# Altium PCB PCB1.PcbDoc
Units mil, origin at the board's own origin, x right, y up, seen from the top; angles counter-clockwise.
Board outline 8540 x 3380 mil, 2 copper layers (Top Layer, Bottom Layer); 76 components, 75 nets, 303 pads, 25 vias.
Unrouted connection lines stored in the file: 2.
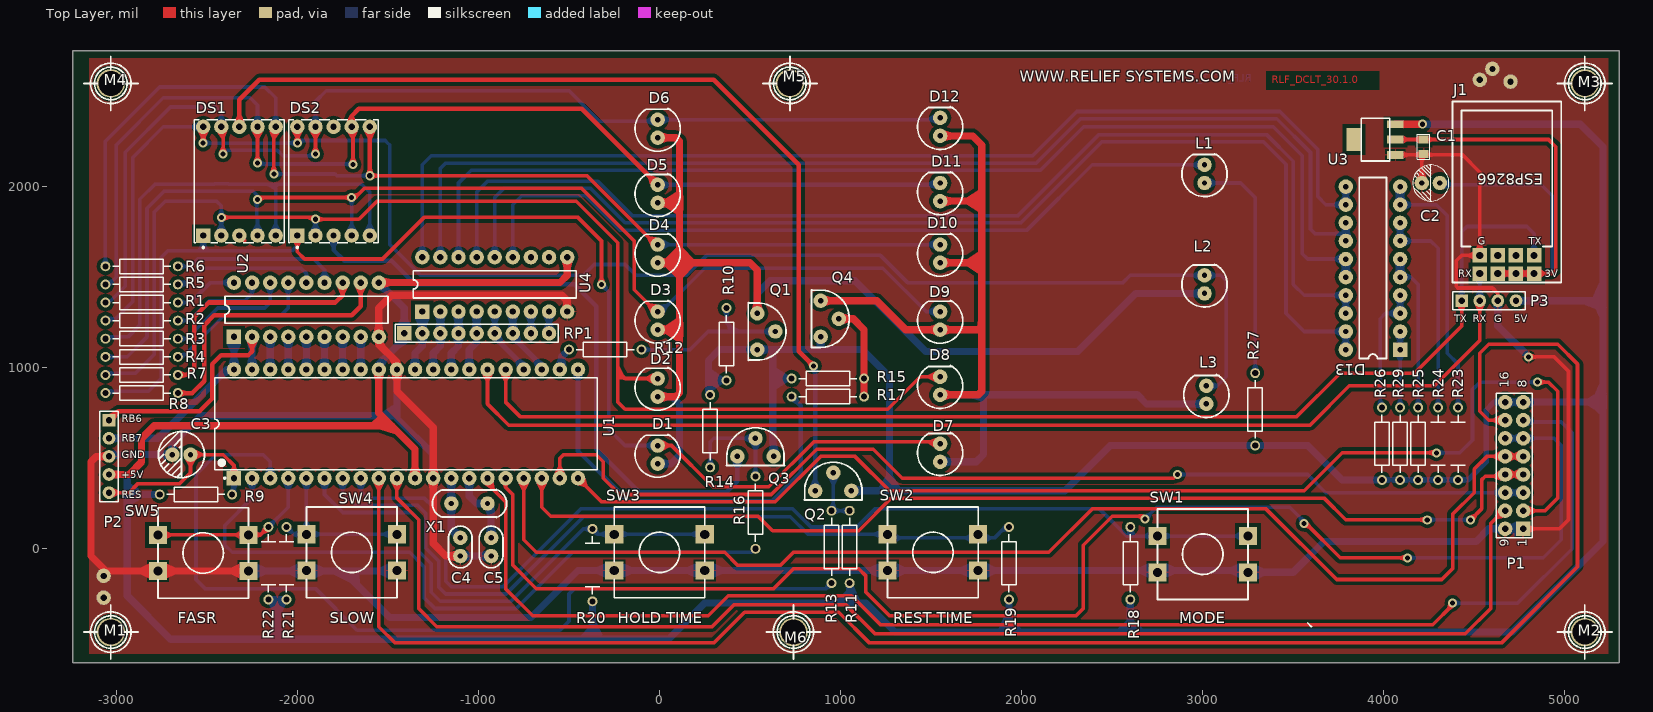
[diagram p0: Top Layer view]
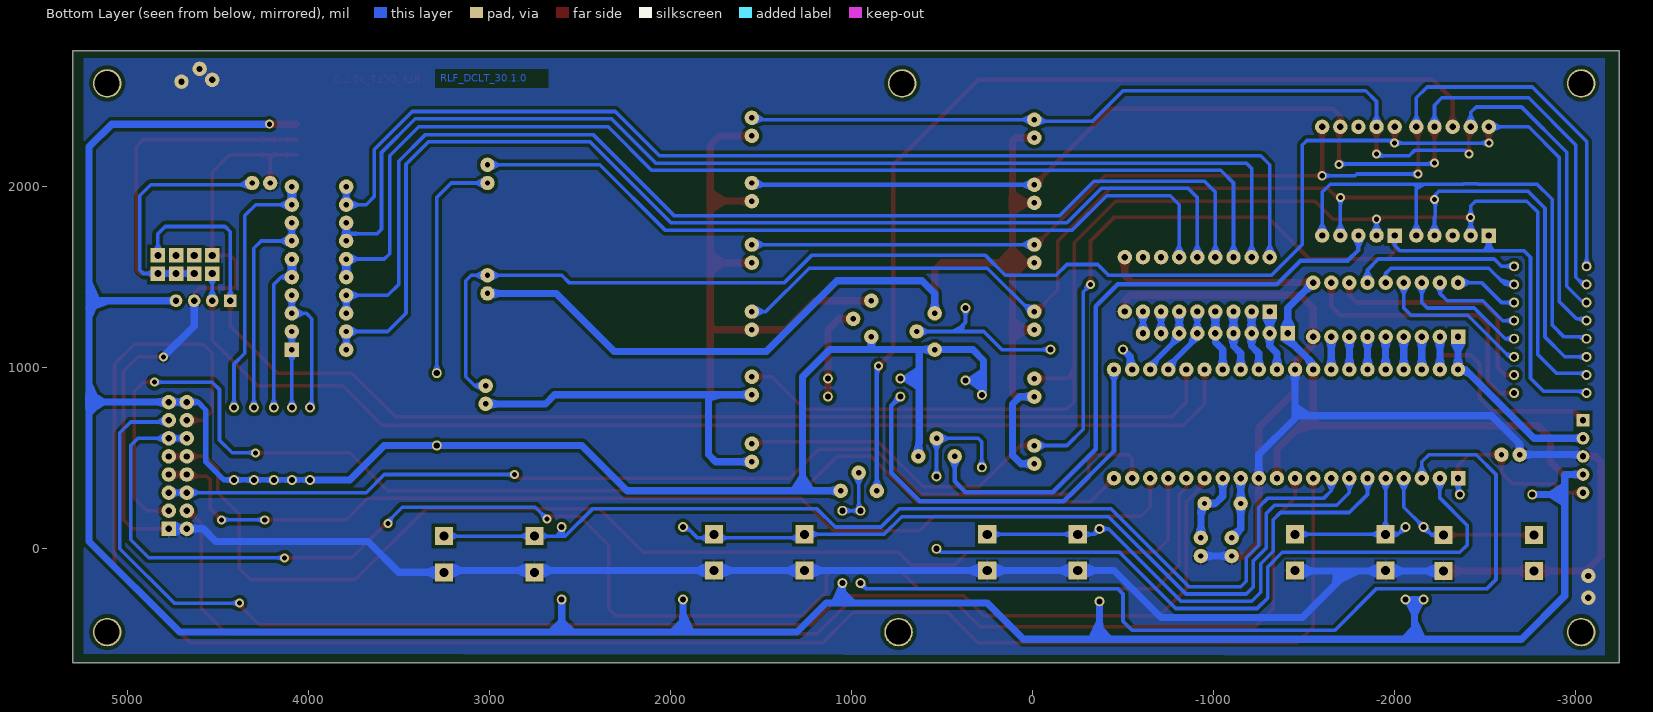
[diagram p1: Bottom Layer view, seen from below]

## Layer stack, top to bottom
Top Solder: solder mask 0.4, Solder Resist, Dk 3.5
Top Layer: signal copper 1.4
Dielectric 1: dielectric 12.6, FR-4, Dk 4.8
Bottom Layer: signal copper 1.4
Bottom Solder: solder mask 0.4, Solder Resist, Dk 3.5

## Board outline
-3240,2750 -3240,1780 -3240,-630 -2970,-630 5300,-630 5300,860 5300,2750

## Design rules (kind name [scope] priority, off if disabled: settings)
Clearance [All] p1: gap=20
PolygonConnect [All] p1: connectstyle=Relief reliefconductorwidth=10 reliefentries=4 polygonreliefangle="90 Angle" airgapwidth=10
RoutingVias [All] p1: holewidth=28 width=50 viastyle="Through Hole" minholewidth=28 minwidth=50 maxholewidth=28 maxwidth=50
SolderMaskExpansion [All] p1: expansion=4
UnpouredPolygon [All] p1: allowunpoured=FALSE
Width [All] p1: maxlimit=100 minlimit=10 preferedwidth=20
29 further rules are at their usual default settings.

## Classes and differential pairs
component class Sheet3: D13 L1 R18 R19 R20 R21 R22 R23 R24 R25 R26 R27 R29 SW1 SW2 SW3 SW4 SW5 U4
component class Sheet2: D1 D2 D3 D4 D5 D6 D7 D8 D9 D10 D11 D12 DS1 DS2 L2 L3 M1 M2 M3 M4 M5 M6 Q1 Q2 Q3 Q4 R10 R11 R12 R13 R14 R15 R16 R17
component class Sheet1: C1 C2 C3 C4 C5 J1 P1 P2 P3 R1 R2 R3 R4 R5 R6 R7 R8 R9 RP1 U1 U2 U3 X1

## Components (designator, comment, footprint, x,y, rotation, side; value= is the part's Value field where it differs from the comment)
C1 "Cap" RES0805 4220,2220 r90 top
C2 "Cap" Capacitor10UF/63V 4260,2020 r180 top
C3 "Cap" CAP_220uF -2640,520 r180 top
C4 "Cap" CAP_104 -1100,10 r90 top
C5 "Cap" CAP_104 -930,10 r90 top
D1 "LED" LED5MM -10,520 r90 top locked
D2 "LED" LED5MM -10,890 r90 top locked
D3 "LED" LED5MM -10,1260 r90 top locked
D4 "LED" LED5MM -10,1630 r90 top locked
D5 "LED" LED5MM -10,1960 r90 top locked
D6 "LED" LED5MM -10,2320 r90 top locked
D7 "LED" LED5MM 1550,530 r90 top locked
D8 "LED" LED5MM 1550,900 r90 top locked
D9 "LED" LED5MM 1550,1260 r90 top locked
D10 "LED" LED5MM 1550,1630 r90 top locked
D11 "LED" LED5MM 1550,1970 r90 top locked
D12 "LED" LED5MM 1550,2330 r90 top locked
D13 "LED BAR" LED_BAR 4090,1100 r180 top
DS1 "HDSP-511A" HDSP-51 -2320,2030 r0 top locked
DS2 "HDSP-511A" HDSP-51 -1800,2030 r0 top locked
J1 "ESP8266" ESP8266 4830,1620 r0 top
L1 "LED" LED5MM 3010,2070 r90 top locked
L2 "LED" LED5MM 3010,1460 r90 top locked
L3 "LED" LED5MM 3020,850 r90 top locked
M1 "MH" "Mounting hole" -3030,-460 r0 top
M2 "MH" "Mounting hole" 5110,-460 r0 top
M3 "MH" "Mounting hole" 5110,2570 r0 top
M4 "MH" "Mounting hole" -3030,2570 r0 top
M5 "MH" "Mounting hole" 720,2570 r0 top
M6 "MH" "Mounting hole" 740,-460 r0 top
P1 "Header 8X2A" HDR2X8_CEN 4770,110 r90 top
P2 "Header 5" HDR1X5 -3040,710 r270 top
P3 "Header 4" HDR1X4 4430,1370 r0 top
Q1 "BC558" TRANSISTOR_BC548 540,1200 r0 top
Q2 "BC558" TRANSISTOR_BC548 960,320 r90 top
Q3 "BC558" TRANSISTOR_BC548 530,510 r90 top
Q4 "BC558" TRANSISTOR_BC548 890,1270 r0 top
R1 "Res2" AXIAL-0.4 -2860,1360 r180 top
R2 "Res2" AXIAL-0.4 -2860,1260 r180 top
R3 "Res2" AXIAL-0.4 -2860,1160 r180 top
R4 "Res2" AXIAL-0.4 -2860,1060 r180 top
R5 "Res2" AXIAL-0.4 -2860,1460 r180 top
R6 "Res2" AXIAL-0.4 -2860,1560 r180 top
R7 "Res2" AXIAL-0.4 -2860,960 r180 top
R8 "Res2" AXIAL-0.4 -2860,860 r180 top
R9 "Res2" AXIAL-0.4 -2560,300 r180 top
R10 "Res2" AXIAL-0.4 370,1130 r270 top
R11 "Res2" AXIAL-0.4 1050,10 r270 top
R12 "Res2" AXIAL-0.4 -300,1100 r180 top
R13 "Res2" AXIAL-0.4 950,10 r270 top
R14 "Res2" AXIAL-0.4 280,650 r90 top
R15 "Res2" AXIAL-0.4 930,940 r180 top
R16 "Res2" AXIAL-0.4 530,200 r270 top
R17 "Res2" AXIAL-0.4 930,840 r180 top
R18 "Res2" AXIAL-0.4 2600,-80 r270 top
R19 "Res2" AXIAL-0.4 1930,-80 r270 top
R20 "Res2" AXIAL-0.4 -370,-90 r270 top
R21 "Res2" AXIAL-0.4 -2060,-80 r270 top
R22 "Res2" AXIAL-0.4 -2160,-80 r270 top
R23 "Res2" AXIAL-0.4 4410,580 r270 top
R24 "Res2" AXIAL-0.4 4300,580 r270 top
R25 "Res2" AXIAL-0.4 4190,580 r270 top
R26 "Res2" AXIAL-0.4 3990,580 r270 top
R27 "Res2" AXIAL-0.4 3290,770 r90 top
R29 "Res2" AXIAL-0.4 4090,580 r270 top
RP1 "SIP" HDR1X9 -1410,1190 r0 top
SW1 "SWITCH_BIG" "SWITCH - BIG" 3000,-30 r0 top locked
SW2 "SWITCH_BIG" "SWITCH - BIG" 1510,-20 r0 top locked
SW3 "SWITCH_BIG" "SWITCH - BIG" 0,-20 r0 top locked
SW4 "SWITCH_BIG" "SWITCH - BIG" -1700,-20 r0 top locked
SW5 "SWITCH_BIG" "SWITCH - BIG" -2520,-23.3 r0 top locked
U1 "PIC16F877A-E/P" PDIP600-P40 -1400,690 r90 top
U2 "ULN2803" ULN2803 -2350,1170 r90 top
U3 "Reg" LM1117 3950,2260 r90 top
U4 "ULN2803" ULN2803 -1310,1310 r90 top
X1 "CRYSTAL" CRYSTAL -1050,250 r180 top

## Footprints (in the part's own frame and the unit in brackets; to place one, negate y for a bottom-side part, rotate by r counter-clockwise, add the part's x,y. Pads: shape width x height; smd on the part's side, far side on the other; paste and mask are expansions set on the pad)
AXIAL-0.4 [mm] "Axial Device, Thru-Hole; 2 Leads; 0.4 in Pin Spacing"
  round 1.4 hole 0.85: 1(-5.08,0) 2(5.08,0)
  silkscreen extent -4.06,-1.02 4.06,1.02
CAP_104 [mil]
  round 80 hole 30: 1(-50,0) 2(50,0)
  silkscreen extent -115,-65 115,65
CAP_220uF [mil]
  round 80 hole 30: 1(-50,0) 2(50,0)
  silkscreen extent -127,-127 127,127
Capacitor10UF/63V [mil]
  round 80 hole 30: 1(-50,0) 2(50,0)
  silkscreen extent -100,-100 100,100
CRYSTAL [mil] "200mil"
  round 80 hole 30: 1(-100,0) 2(100,0)
  silkscreen extent -205,-76 204,76
ESP8266 [mil] "Serial WiFi Module"
  rect 80x80 hole 40: 1(0,0) 2(0,-100) 3(-100,0) 4(-100,-100) 5(-200,0) 6(-200,-100) 7(-300,0) 8(-300,-100)
  silkscreen extent -450,-150 150,850
HDR1X4 [mil] "Connector; Header; 4 Position"
  rect 70x70 hole 35.43: 1(0,0)
  round 70 hole 35.43: 2(100,0) 3(200,0) 4(300,0)
  silkscreen extent -50,-50 350,50
HDR1X5 [mil] "Connector; Header; 5 Position"
  rect 70x70 hole 35.43: 1(0,0)
  round 70 hole 35.43: 2(100,0) 3(200,0) 4(300,0) 5(400,0)
  silkscreen extent -50,-50 450,50
HDR1X9 [mil] "Connector; Header; 9 Position"
  rect 80x80 hole 35: 1(0,0)
  round 80 hole 35: 2(100,0) 3(200,0) 4(300,0) 5(400,0) 6(500,0) 7(600,0) 8(700,0) 9(800,0)
  silkscreen extent -50,-50 850,50
HDR2X8_CEN [mil] "Connector; Header; 8x2 Position"
  rect 80x80 hole 35: 1(0,0)
  round 80 hole 35: 2(100,0) 3(200,0) 4(300,0) 5(400,0) 6(500,0) 7(600,0) 8(700,0) 9(0,100) 10(100,100) 11(200,100) 12(300,100) 13(400,100) 14(500,100) 15(600,100) 16(700,100)
  silkscreen extent -50,-50 750,150
HDSP-51 [mil] "LED, 7-Segment Display, 14.27 mm, RHD; 10 Leads; Row Space 15.24 mm; Pitch 2.54 mm"
  rect 80x80 hole 35: 1(-200,-300)
  round 80 hole 35: 2(-100,-300) 3(0,-300) 4(100,-300) 5(200,-300) 6(200,300) 7(100,300) 8(0,300) 9(-100,300) 10(-200,300)
  silkscreen extent -248,-371 248,341
LED5MM [mil]
  round 80 hole 30: 1(-50,0) 2(50,0)
  silkscreen extent -125,-125 112,125
LED_BAR [mil]
  rect 80x80 / inner rect 100x50 / far side rect 80x80 hole 30: 1(0,0)
  round 80 / inner oval 100x50 / far side round 80 hole 30: 2(0,-100) 3(0,-200) 4(0,-300) 5(0,-400) 6(0,-500) 7(0,-600) 8(0,-700) 9(0,-800) 10(0,-900) 11(300,-900) 12(300,-800) 13(300,-700) 14(300,-600) 15(300,-500) 16(300,-400) 17(300,-300) 18(300,-200) 19(300,-100) 20(300,0)
  silkscreen extent 75,-950 225,50
LM1117 [mm]
  rect 1.1x2.3 smd: 1(-2.15,-2.9) 2(0,-2.9) 3(2.15,-2.9)
  rect 3.25x2.15 smd: 4(0,2.9)
  silkscreen extent -3,-2.1 3,1.9
"Mounting hole" [mm]
  round 4 hole 3.5: ""(0,0)
  silkscreen extent -3.81,-3.81 3.81,3.81
PDIP600-P40 [mil] "DIP, 40-Leads, Row Spacing 15.24mm, Pitch 2.54mm, Body 51.8x13.5mm"
  rect 80x80 hole 35: 1(-300,950)
  round 80 hole 35: 2(-300,850) 3(-300,750) 4(-300,650) 5(-300,550) 6(-300,450) 7(-300,350) 8(-300,250) 9(-300,150) 10(-300,50) 11(-300,-50) 12(-300,-150) 13(-300,-250) 14(-300,-350) 15(-300,-450) 16(-300,-550) 17(-300,-650) 18(-300,-750) 19(-300,-850) 20(-300,-950) 21(300,-950) 22(300,-850) 23(300,-750) 24(300,-650) 25(300,-550) 26(300,-450) 27(300,-350) 28(300,-250) 29(300,-150) 30(300,-50) 31(300,50) 32(300,150) 33(300,250) 34(300,350) 35(300,450) 36(300,550) 37(300,650) 38(300,750) 39(300,850) 40(300,950)
  silkscreen extent -305,-1057 254,1057, body extent -287,-1057 287,1057, height 250
RES0805 [mm]
  rect 1.1x1.4 smd: 1(-1,0) 2(1,0)
  silkscreen extent -1.75,-0.89 1.77,0.89
"SWITCH - BIG" [mil]
  rect 100x100 hole 50: 1(-250,100) 2(-250,-100) 3(250,-100) 4(250,100)
  silkscreen extent -250,-250 250,250
TRANSISTOR_BC548 [mil]
  round 80 hole 30: 1(0,100) 2(100,0) 3(0,-100)
  silkscreen extent -50,-160 158,160
ULN2803 [mil]
  rect 80x80 / inner rect 100x50 / far side rect 80x80 hole 35: 1(0,0)
  round 80 / inner oval 100x50 / far side round 80 hole 35: 2(0,-100) 3(0,-200) 4(0,-300) 5(0,-400) 6(0,-500) 7(0,-600) 8(0,-700) 9(0,-800) 10(300,-800) 11(300,-700) 12(300,-600) 13(300,-500) 14(300,-400) 15(300,-300) 16(300,-200) 17(300,-100) 18(300,0)
  silkscreen extent 75,-850 225,50

## Part data
C1: library part CAP_104_SMD, "Cap_104_SMD"
C2: library part Cap-10uf/63V, "Cap10uf/63V"
C3: library part CAP_220uF, "Cap_220uF"
C4 C5: library part CAP_104, "Cap_104"
D1 D2 D3 D4 D5 D6 D7 D8 D9 D10 D11 D12 L1 L2 L3: library part LED_5MM, "LED_5MM"
D13: library part LED_BAR
DS1 DS2: "14.22 mm General Purpose AlGaAs Red 7-Segment Display: CA, RH DP"
J1: "WIFI Module"
P1: "Header, 8-Pin, Dual row"
P2: "Header, 5-Pin"
P3: "Header, 4-Pin"
Q1 Q2 Q3 Q4: "PNP"
R1 R2 R3 R4 R5 R6 R7 R8 R9 R10 R11 R12 R13 R14 R15 R16 R17 R18 R19 R20 R21 R22 R23 R24 R25 R26 R27 R29: "Resistor"
RP1: library part "Header 9", "Network resistor 9 pin"
SW1 SW2 SW3 SW4 SW5: "Big size"
U1: "Enhanced FLASH Microcontroller, 8K (x14-Bit words) FLASH, 368 Bytes RAM, 40-Pin PDIP, Standard VDD Range, Extended Temperature"
U2 U4: "??voltage,  high??current darlington drivers comprised of eight NPN  darlington pairs.  All units feature integral clamp diodes for"
U3: library part LM1117

## Free pads (board coordinates)
  round 80 hole 35: 0(-3070,-150) 1(-3070,-270) 2(4530,2590) 3(4700,2580) 4(4600,2650)

## Via types
v1: diameter 50, hole 28, Top Layer to Bottom Layer, 25 vias

## Nets (pads, with @x,y where several pads share a name; then routed paths per layer and width w, separated by ;. In a path a pad name is that pad's centre, name@x,y a point inside that pad or via, vN(x,y) a via of type N, cw(c..) or ccw(c..) an arc to the next point about the centre after c; other vN are vias at no path point)
3V: C1.2 C2.1 J1.2 J1.4 J1.6 U3.2 | length 3278
  Top Layer w20: U3.2 4910,2260 4950,2220 4950,1540 4930,1520 J1.2 J1.4 J1.6
  Bottom Layer w20: C2.1 4320,2010 4870,2010 4930,1950 4930,1540 4910,1520 J1.2 J1.4 J1.6
+5: P1.8 P1.16 P2.4 P3.4 Q1.3 Q2.3 Q3.3 Q4.3 R9.2 R10.2 R11.2 R14.2 R15.2 R18.2 R19.2 R20.2 R21.2 R22.2 R23.2 R24.2 R25.2 R26.2 R27.1 R29.2 RP1.1 U1.11 U1.32 U2.10 U3.3 U4.10 | length 26975.1
  Top Layer w40: P2.4 -2930,410 -2860,480 -2860,610 -2790,680 -1480,680 -1350,550 ; U1.32 -1550,750 -1350,550 ; U2.10 -550,1470 -510,1510 U4.10 ; U1.11 -1350,550 ; U3.3 v1(4214.65,2344.65)
  Bottom Layer w30: R26.2 R29.2 R25.2 R24.2 R23.2 4464.85,380 4565,480.15 4565,765 4610,810 P1.16 P1.8
  Bottom Layer w40: P2.4 -2940,410 -2940,300 ; R9.2 -2940,300 ; R22.2 -2110,-280 ; -2150,-490 -2110,-450 ; -2100,-450 -2060,-490 ; R21.2 -2110,-280 ; U1.32 -1550,1020 -1410,1160 RP1.1 -1410,1330 U2.10 ; -420,-490 -380,-450 ; -370,-450 -330,-490 ; R20.2 -370,-490 -360,-500 ; R14.2 270,850 270,930 ; R10.2 270,930 ; 625,1085 625,940 ; Q3.3 630,580 625,585 625,940 ; R15.2 625,940 ; 890,1110 Q4.3 ; 1000,-290 1040,-250 ; 1050,-250 1090,-290 ; R11.2 1050,-280 1030,-300 ; Q2.3 1270,320 ; 1890,-450 1930,-410 ; 1930,-450 R19.2 ; 1940,-410 1980,-450 ; 2550,-450 2590,-410 ; 2600,-450 R18.2 ; 2610,-410 2650,-450 ; R26.2 3770,380 3580,570 2490,570 2240,320 1270,320 ; v1(4214.65,2344.65) 5085.35,2344.65 5210,2220 5210,1420 ; P3.4 5170,1370 ; P1.8 5210,810 ; 5160,800 5200,760 ; 5170,820 5210,860 ; 5210,1330 5170,1370 ; -2940,300 -2940,-260 -2700,-500 -2100,-500 ; -2110,-280 -2110,-490 -2100,-500 ; -2100,-500 -360,-500 ; -360,-500 50,-500 250,-300 1030,-300 ; 270,930 270,1040 330,1100 490,1100 Q1.3 1120,1100 1270,950 1270,320 ; 1030,-300 1140,-300 1300,-460 4710,-460 5210,40 5210,1420 ; 5170,1370 5170,1380 5210,1420
A: D5.2 D11.2 DS1.7 DS2.7 R5.2 | length 6276.7
  Top Layer w20: v1(-2220,2130) DS1.7 ; DS2.7 -1692.5,2322.5 v1(-1692.5,2122.5)
  Top Layer w25: DS2.7 -1700,2390 -1660,2430 -430,2430 D5.2
  Bottom Layer w20: R5.2 -3040,1460 -3000,1500 -3000,2230 -2740,2490 -2260,2490 -2220,2450 DS1.7 ; v1(-2220,2130) -2215,2125 -1695,2125 v1(-1692.5,2122.5)
  Bottom Layer w25: D5.2 1540,2010 D11.2
B: D4.2 D10.2 DS1.6 DS2.6 R6.2 | length 6303.1
  Top Layer w20: v1(-2130,2070) -2130,2300 -2120,2310 -2130,2320 DS1.6 ; v1(-1600,2060) -400,2060 -20,1680 D4.2
  Top Layer w25: v1@-1600,2080 DS2.6
  Bottom Layer w20: R6.2 -3060,2250 -2760,2550 -2180,2550 -2120,2490 DS1.6 ; v1(-2130,2070) -1792.5,2070 -1782.5,2060 v1(-1600,2060) ; D4.2 D10.2
C: D3.2 D9.2 DS1.4 DS2.4 R4.2 | length 6485.8
  Top Layer w20: v1(-2220,1930) -2220,1940 v1(-1700,1940) ; v1@-1690,1930 -1630,1990 -430,1990 -140,1700 -140,1430 -20,1310 D3.2
  Bottom Layer w20: R4.2 -2940,1060 -2830,1170 -2830,1880 -2736.27,1973.73 -2444.05,1973.73 -2442.78,1975 -2397.22,1975 -2395.95,1973.73 -2243.73,1973.73 -2225.15,1955.15 ; R4.2@-3060,1070 -3058.11,1070 R4.2@-3058.11,1069.7 ; v1@-2225.15,1930 -2225.15,1834.85 -2220,1829.7 DS1.4 ; DS2.4 v1(-1700,1940) ; D3.2 10,1310 250,1550 1233.43,1550 1473.43,1310 D9.2
CONTROL_LINE_SEGMENT1_RA1: R13.2 U1.3 | length 4963.7
  Bottom Layer w20: U1.3 -2150,480 -2190,520 -2450,520 -2560,410 -2560,-170 -2510.06,-219.94 -1900.06,-219.94 -1670,-450 -550,-450 -500,-400 -500,-250 -469.94,-219.94 -345.12,-219.94 -345.06,-220 920,-220 R13.2
CONTROL_LINE_SEGMENT2_RA0: R16.2 U1.2 | length 3743.4
  Bottom Layer w20: U1.2 -2250,280 -2400,130 -2400,20 -2360,-20 -1380,-20 -1300,-100 -1300,-270 -1240,-330 -790.71,-330 -480.71,-20 510,-20 R16.2
D: D2.2 D8.2 DS1.2 DS2.2 R7.2 | length 7099.8
  Top Layer w20: v1(-2420,1830) -1910,1830 v1(-1900,1820) -1660,1820 -1560,1920 -460,1920 -230,1690 -230,980 ; D2.2 -190,940 -230,980 ; D8.2 1440,950 1260,770 -190,770 -230,810 -230,980
  Bottom Layer w20: R7.2 R7.2@-3050.3,969.7 ; R7.2@-3060,970 -3058.11,970 -3058.11,969.7 R7.2@-3050.3,969.7 ; DS1.2 v1(-2420,1830) -2420,1893.73 -2446.27,1920 -2730,1920 -2790,1860 -2790,1073.43 -2893.73,969.7 R7.2@-3050.3,969.7 ; DS2.2 -1910,1740 -1900,1750 v1(-1900,1820)
E: D1.2 D7.2 DS1.1 DS2.1 R8.2 | length 6991.7
  Top Layer w20: DS2.1 -2000,1640 -1960,1600 -1530,1600 -1300,1830 -450,1830 -320,1700 v1(-320,1460) ; D1.2 66.57,570 294.13,342.44 603.85,342.44 851.41,590 1550,590 D7.2
  Bottom Layer w20: R8.2@-3060,870 -3058.11,870 -3058.11,869.7 -2822,869.7 -2750,941.7 -2750,1610 -2715,1645 -2520,1645 ; DS1.1 -2520,1645 ; DS2.1 -2000,1675 -2030,1645 -2520,1645 ; v1(-320,1460) -280,1420 -280,660 -190,570 D1.2
F: D6.2 D12.2 DS1.9 DS2.9 R1.2 | length 6141.7
  Top Layer w20: DS1.9 -2410,2320 v1(-2410,2180) ; v1(-1900,2180) DS2.9
  Bottom Layer w20: R1.2@-3060,1370 -3030,1370 -2950,1450 -2950,2190 -2700,2440 -2450,2440 -2420,2410 DS1.9 ; v1(-2410,2180) -2390,2200 -2110,2200 -2080,2170 -1920,2170 -1910,2180 v1(-1900,2180) ; DS2.9 -1900,2470 -1840,2530 -500,2530 -330,2360 -20,2360 D6.2 1540,2370 D12.2
G: DS1.10 DS2.10 L2.2 L3.2 R2.2 | length 8744.9
  Top Layer w20: v1(-2520,2240) DS1.10 ; v1(-2000,2240) DS2.10
  Bottom Layer w20: R2.2@-3060,1270 -3004.7,1270 -2910,1364.7 -2910,2160 -2740,2330 DS1.10 ; v1(-2520,2240) v1(-2000,2240) -1985,2255 -1515,2255 -1500,2240 ; -1490,2230 -1490,1680 -1320,1510 -420,1510 -360,1570 -190,1570 -130,1510 150,1510 260,1620 1220,1620 1370,1470 2560,1470 2600,1510 L2.2 3100,1510 3130,1480 3130,950 3080,900 L3.2
GND: C1.1 C2.2 C3.2 C4.1 C5.1 J1.7 P1.1 P1.9 P2.3 P3.3 pad.0 pad.1 pad.2 pad.3 pad.4 SW1.2 SW1.3 SW2.2 SW2.3 SW3.2 SW3.3 SW4.2 SW4.3 SW5.2 SW5.3 U1.12 U1.31 U2.9 U3.1 U4.9 | length 17902.2
  Top Layer w20: U3.1 4434.65,2175.35 4530,2080 J1.7 4430,1620 4400,1590 4400,1450 4410,1440 4600,1440 4630,1410 P3.3 ; C2.2 C1.1@4210,2170.63 ; P1.1 4970,110 5020,160 5020,980 4940,1060 v1(4800,1060)
  Top Layer w40: P2.3 -3110,510 -3140,480 -3140,-40 -3056.7,-123.3 SW5.2 SW5.3 ; C4.1 -1180,-40 -1250,30 U1.12 -1250,670 -1450,870 U1.31 -1450,1030 -1550,1130 U2.9 -1550,1330 -1480,1400 -540,1400 -510,1370 U4.9
  Bottom Layer w40: P2.3@-3030,520 C3.2 -2690,580 -2535,735 -1450,735 ; SW5.3 -1746.7,-123.3 ; SW4.3@-1450,-123.3 -1746.7,-123.3 ; U1.31 -1450,735 ; U1.12 -1250,520 -1450,720 -1450,735 ; C4.1 C5.1 ; P3.3 4630,1230 v1(4800,1060) ; P1.1 P1.9 4580,110 4510,40 3670,40 3500,-130 SW1.3 3240,-120 SW2.3 SW2.2 SW3.3 SW3.2 -450,-120 -710,-380 -1490,-380 -1746.7,-123.3
H: DS1.5 DS2.5 R3.2 | length 2768.9
  Bottom Layer w20: R3.2@-3060,1170 -2935.7,1170 -2870,1235.7 -2870,1930 -2786.27,2013.73 -2460.62,2013.73 -2459.35,2015 -2380.65,2015 -2379.38,2013.73 -2143.73,2013.73 ; DS1.5 -2120,1990 -2143.73,2013.73 ; DS2.5 -1600,1970 -1643.73,2013.73 -2143.73,2013.73
LED_CONTROL_LINE2_RD3: R12.2 U1.22 | length 130.7
  Bottom Layer w40: U1.22 -540,1000 -540,1060 R12.2
LED_CONTROL_LINE_RD2: R17.2 U1.21 | length 2300.9
  Bottom Layer w25: U1.21 -450,540 -172.5,262.5 622.5,262.5 780,420 780,790 R17.2
MCLR: C3.1 P2.5 R9.1 U1.1 | length 1024.6
  Top Layer w20: P2.5 -2930,310 -2880,360 -2650,360 -2590,420 C3.1 -2410,520 -2350,460 U1.1
  Bottom Layer w20: R9.1 -2350,310 U1.1
NetC4_2: C4.2 U1.13 X1.2 | length 350.7
  Bottom Layer w40: U1.13 X1.2 -1150,110 C4.2
NetC5_2: C5.2 U1.14 X1.1 | length 414.9
  Bottom Layer w40: U1.14 -1050,290 -1010,250 X1.1 -930,230 C5.2
NetD1_1: D1.1 D2.1 D3.1 D4.1 D5.1 D6.1 L2.1 Q1.1 | length 6155.5
  Top Layer w40: D2.1 90,840 110,860 110,1580 ; D3.1 110,1210 ; D4.1 110,1580 ; D5.1 110,1910 ; D6.1 90,2270 110,2250 110,1580 ; Q1.1 540,1540 500,1580 110,1580
  Bottom Layer w40: D1.1 63.43,470 110,516.57 110,800 70,840 D2.1 ; Q1.1 540,1410 610,1480 1080,1480 1470,1090 2310,1090 2630,1410 L2.1
NetD7_1: D7.1 D8.1 D9.1 D10.1 D11.1 D12.1 L3.1 Q4.1 | length 5355
  Top Layer w40: Q4.1 1200,1370 1360,1210 D9.1 1770,1210 1780,1220 ; D8.1 1760,850 1780,870 1780,1220 ; D10.1 1780,1580 ; D11.1 1780,1920 ; D12.1 1730,2280 1780,2230 1780,1920 ; 1780,1220 1780,1580 ; 1780,1580 1780,1920
  Bottom Layer w40: D7.1 1750,480 1790,520 1790,830 1770,850 ; D8.1 1770,850 ; L3.1 2840,800 2690,800 2640,850 1810,850 1770,850
NetD13_1: D13.1 D13.2 R29.1 | length 420
  Bottom Layer w20: R29.1 D13.1 D13.2
NetD13_3: D13.3 D13.4 R26.1 | length 716.6
  Bottom Layer w20: R26.1 3980,790 3980,1270 4010,1300 D13.3 D13.4
NetD13_5: D13.5 D13.6 R25.1 | length 896.6
  Bottom Layer w20: D13.5 4150,1500 4190,1460 R25.1
  Bottom Layer w40: D13.5 D13.6
NetD13_7: D13.7 D13.8 R24.1 | length 1206.6
  Bottom Layer w20: D13.8 D13.7 4260,1700 4300,1660 R24.1
NetD13_9: D13.9 D13.10 R23.1 | length 1469.7
  Bottom Layer w20: D13.9 4290,1900 4350,1840 4350,1080 4410,1020 R23.1
  Bottom Layer w40: D13.9 D13.10
NetD13_11: D13.11 D13.12 U4.18 | length 6197.9
  Bottom Layer w20: U4.18 -1310,2120 -1260,2170 2060,2170 2305,2415 3425.21,2415 3635,2205.21 3635,1945 3680,1900 D13.12 D13.11
NetD13_13: D13.13 D13.14 U4.17 | length 6175.1
  Bottom Layer w20: U4.17 -1210,2100 -1180,2130 2080,2130 2325,2375 3408.64,2375 3595,2188.64 3595,1765 3620,1740 D13.14@3790,1740
  Bottom Layer w40: D13.14@3790,1740 D13.13
NetD13_15: D13.15 D13.16 U4.16 | length 6157.1
  Bottom Layer w20: U4.16 -1110,2020 -1040,2090 2103.64,2090 2343.64,2330 3390,2330 3550,2170 3550,1630 3580,1600 D13.15
  Bottom Layer w40: D13.16 D13.15
NetD13_17: D13.17 D13.18 U4.15 | length 6314.9
  Bottom Layer w20: U4.15 -1010,1970 -950,2030 -340,2030 -150,1840 1980,1840 2427.5,2287.5 3352.5,2287.5 3500,2140 3500,1460 3560,1400 D13.17 D13.18
NetD13_19: D13.19 D13.20 U4.14 | length 6331
  Bottom Layer w20: U4.14 -910,1940 -860,1990 -380,1990 -190,1800 1996.57,1800 2444.07,2247.5 3335.93,2247.5 3460,2123.43 3460,1300 3560,1200 D13.19 D13.20
NetDS1_3: DS1.3 DS1.8 Q2.1 | length 5356.4
  Top Layer w25: DS1.3 DS1.3@-2292.5,1702.5 ; DS1.8 -2320,2480 -2210,2590 300,2590 770,2120 770,1090 v1(850,1010)
  Bottom Layer w25: v1(850,1010) 860,1000 Q2.1
NetDS2_3: DS2.3 DS2.8 Q3.1 | length 3489.3
  Bottom Layer w25: DS2.3 -1800,1650 -1740,1590 -1480,1590 -1350,1460 -470,1460 -350,1340 -350,550 -112.5,312.5 370.3,312.5 430,372.2 Q3.1
NetL1_1: L1.1 R27.2 | length 1283.1
  Bottom Layer w20: L1.1 3210,2020 3290,1940 R27.2
NetL1_2: L1.2 U4.13 | length 4358.5
  Bottom Layer w20: U4.13 -810,1900 -760,1950 -410,1950 -220,1760 2030,1760 2390,2120 L1.2
NetQ1_2: Q1.2 R10.1 R12.1 | length 932.1
  Bottom Layer w20: R12.1 170,1100 270,1200 420,1200 ; R10.1 370,1250 420,1200 ; Q1.2 420,1200
NetQ2_2: Q2.2 R11.1 R13.1 | length 314.1
  Bottom Layer w20: Q2.2 960,220 R13.1 R11.1
NetQ3_2: Q3.2 R14.1 R16.1 | length 608.3
  Bottom Layer w20: R14.1 280,590 300,610 Q3.2 R16.1
NetQ4_2: Q4.2 R15.1 R17.1 | length 534.9
  Top Layer w40: Q4.2 1070,1270 1130,1210 R15.1 R17.1
NetR1_1: R1.1 U2.18 | length 355.6
  Bottom Layer w20: R1.1 -2590,1360 -2480,1470 U2.18
NetR2_1: R2.1 U2.17 | length 532.1
  Bottom Layer w20: R2.1 -2597.28,1260 -2487.28,1370 -2290,1370 -2250,1410 U2.17
NetR3_1: R3.1 U2.16 | length 702.8
  Bottom Layer w20: R3.1 -2610,1160 -2440,1330 -2180,1330 -2150,1360 U2.16
NetR4_1: R4.1 U2.15 | length 861.8
  Bottom Layer w20: R4.1 -2633.43,1060 -2403.43,1290 -2090,1290 -2050,1330 U2.15
NetR5_1: R5.1 U2.14 | length 869.7
  Bottom Layer w20: R5.1 -2610,1460 -2520,1550 -1980,1550 -1950,1520 U2.14 ; R5.1@-2660,1470 -2600,1470
NetR6_1: R6.1 U2.13 | length 921.4
  Bottom Layer w20: R6.1 -2590,1560 -2550,1600 -1910,1600 -1850,1540 U2.13
NetR7_1: R7.1 U2.12 | length 1326.3
  Top Layer w25: R7.1 -2610,960 -2570,1000 -2570,1280 -2490,1360 -1790,1360 -1750,1400 U2.12
NetR8_1: R8.1 U2.11 | length 1530.4
  Top Layer w25: R8.1@-2670,870 R8.1@-2660,870 ; R8.1 -2580,860 -2515,925 -2515,1235 -2460,1290 -1700,1290 -1650,1340 U2.11
RA2_WS5: R22.1 SW5.1 SW5.4 U1.4 | length 1071.4
  Top Layer w20: SW5.1 SW5.4 -2203.3,76.7 R22.1
  Bottom Layer w20: SW5.4 -2203.3,76.7 R22.1 -2050,230 U1.4
RA3_SW4: R21.1 SW4.1 SW4.4 U1.5 | length 936.6
  Bottom Layer w20: R21.1 -2020,80 SW4.1 ; U1.5 SW4.1 ; SW4.4 SW4.1
RA4_SW3: R20.1 SW3.1 SW3.4 U1.6 | length 2805.8
  Bottom Layer w20: U1.6 -1850,300 -1750,200 -1370,200 -1330,160 -1330,-13.43 -1260,-83.43 -1260,-240 -1210,-290 -820,-290 -420,110 R20.1 -340,80 SW3.1 SW3.4
RA5_SW2: R19.1 SW2.1 SW2.4 U1.7 | length 4417.9
  Bottom Layer w20: U1.7 -1750,310 -1680,240 -1336.57,240 -1290,193.43 -1290,3.14 -1220,-66.86 -1220,-210 -1180,-250 -847.56,-250 -420,177.56 722.44,177.56 820,80 SW2.1 1280,60 1850,60 R19.1@1910,120
RB0: U1.33 U2.8 | length 180
  Bottom Layer w40: U1.33 U2.8
RB1: U1.34 U2.7 | length 180
  Bottom Layer w40: U1.34 U2.7
RB2: U1.35 U2.6 | length 180
  Bottom Layer w40: U1.35 U2.6
RB3: U1.36 U2.5 | length 180
  Bottom Layer w40: U1.36 U2.5
RB4: U1.37 U2.4 | length 180
  Bottom Layer w40: U1.37 U2.4
RB5: U1.38 U2.3 | length 180
  Bottom Layer w40: U1.38 U2.3
RB6: P2.1 U1.39 U2.2 | length 1318.7
  Top Layer w25: P2.1 -2990,760 -2540,760 -2470,830 -2470,1020 -2420,1070 -2270,1070 -2250,1090 U2.2
  Bottom Layer w40: U1.39 U2.2
RB7: P2.2 U1.40 U2.1 | length 1027.4
  Bottom Layer w40: P2.2 -2770,610 -2390,990 U1.40 U2.1
RC0: P1.7 U1.15 | length 7834.2
  Top Layer w20: U1.15 -950,360 -850,260 -850,-220 -700,-370 270,-370 380,-260 1060,-260 1220,-420 4270,-420 4380,-310 v1(4380,-300)
  Bottom Layer w20: v1(4380,-300) 4740,-300 5040,0 5040,640 4980,700 4780,700 P1.7
RC1: P1.6 P1.14 U1.16 | length 8022.2
  Top Layer w20: U1.16 -850,340 -810,300 -810,-90 -680,-220 630,-220 740,-110 1100,-110 1140,-150 1140,-240 1270,-370 2300,-370 2340,-330 2340,20 2500,180 2666.36,180 v1(2681.36,165) ; v1(3560,140) 3570,140 3760,-50 v1(4130,-50)
  Bottom Layer w20: v1(2681.36,165) 2746.36,230 3480,230 3560,150 v1(3560,140) ; v1(4130,-50) 4880,-50 4980,50 4980,570 4940,610 P1.6 P1.14
RC2: P1.5 P1.13 U1.17 | length 6741.5
  Top Layer w20: U1.17 -750,50 -680,-20 360,-20 430,-90 670,-90 740,-20 2150,-20 2390,220 3350,220 3740,-170 4320,-170 4380,-110 4380,190 4500,310 4500,440 4570,510 P1.13 P1.5
RC3: P1.4 P1.12 U1.18 | length 5955.4
  Top Layer w20: U1.18 -650,230 -600,180 544.54,180 624.54,100 1100,100 1280,280 3670,280 3790,160 v1(4240,160) ; v1(4480,160) 4540,220 4540,380 4560,400 4660,400 P1.12 P1.4
  Bottom Layer w20: v1(4240,160) v1(4480,160)
RC4: RP1.7 U1.23 U4.6 | length 346.6
  Bottom Layer w30: RP1.7@-795.71,1155.71 -650,1010 U1.23
  Bottom Layer w40: U4.6 RP1.7 RP1.7@-809.64,1189.65
RC5: RP1.6 U1.24 U4.5 | length 386.3
  Bottom Layer w30: U4.5 RP1.6 -910,1170 -750,1010 U1.24
RC6-TX: J1.1 P3.1 U1.25 | length 6769.2
  Top Layer w20: U1.25 -850,810 -770,730 3520,730 3760,970 4170,970 4430,1230 P3.1
  Bottom Layer w20: P3.1 4430,1750 4460,1780 4790,1780 4830,1740 J1.1
RC7-RX: J1.8 P3.2 U1.26 | length 6282.4
  Top Layer w20: U1.26 -950,800 -832.44,682.44 3592.44,682.44 3810,900 4280,900 4530,1150 P3.2
  Bottom Layer w20: P3.2 J1.8
RD0: P1.3 P1.11 U1.19 | length 5801.7
  Top Layer w20: U1.19 -550,500 -530,520 -350,520 -310,480 -310,390 -220,300 617.97,300 867.97,550 1180,550 1340,390 2840,390 v1(2860,410)
  Bottom Layer w20: v1(2860,410) 3580,410 3680,310 P1.11 P1.3
RD1: P1.2 U1.20 | length 6888.4
  Top Layer w20: U1.20 -320,260 640,260 890,510 1080,510 1270,320 3560,320 3770,530 v1(4290,530) ; P1.2 4890,210 4960,280 4960,870 4910,920 v1(4850,920)
  Bottom Layer w20: v1(4290,530) 4420,530 4490,600 4490,880 4530,920 v1(4850,920)
RD4: RP1.5 U1.27 U4.4 | length 336.6
  Bottom Layer w40: U1.27 -1050,1100 -1010,1140 RP1.5 U4.4
RD5: RP1.4 U1.28 U4.3 | length 336.6
  Bottom Layer w40: U1.28 -1150,1080 -1110,1120 RP1.4 U4.3
RD6: RP1.3 U1.29 U4.2 | length 336.6
  Bottom Layer w40: U1.29 -1250,1080 -1210,1120 RP1.3 U4.2
RD7: RP1.2 U1.30 U4.1 | length 336.6
  Bottom Layer w40: U1.30 -1350,1080 -1310,1120 RP1.2 U4.1
RE0_SW1: R18.1 SW1.1 SW1.4 U1.8 | length 5761.8
  Bottom Layer w20: U1.8 -1650,320 -1610,280 -1300,280 -1250,230 -1250,19.71 -1180,-50.29 -1180,-180 -1150,-210 -864.13,-210 -434.13,220 736.57,220 836.57,120 1090,120 1190,220 2430,220 2580,70 2600,70 ; R18.1 2600,70 ; SW1.4 SW1.1 2600,70
RE1: P1.15 U1.9 | length 9999.1
  Top Layer w20: U1.9 -1550,-430 -1460,-520 300,-520 470,-350 990,-350 1160,-520 4650,-520 5070,-100 5070,1020 4960,1130 4580,1130 4530,1080 4530,760 4580,710 P1.15
RE2: P1.10 U1.10 | length 7484.1
  Top Layer w20: U1.10 -1450,280 -1330,160 -1330,-330 -1230,-430 290,-430 410,-310 1030,-310 1190,-470 4450,-470 4590,-330 4590,140 4660,210 P1.10
pads on no net: J1.3 J1.5 M1. M2. M3. M4. M5. M6. RP1.8 RP1.9 U3.4 U4.7 U4.8 U4.11 U4.12
copper on no net: | length 280
  Bottom Layer w30: -710,1160 -710,1190 -710,1310 ; -610,1310 -610,1190 -600,1190

## Polygon pours and split planes (outlines as drawn)
GND on Top Layer "Mechanical 1-No Net" (solid, remove dead copper, pour order 6): -3150,2710 -3150,1090 -3150,-580 -1890,-580 5240,-580 5240,-20 5240,2710
GND on Bottom Layer "Mechanical 1-No Net" (solid, remove dead copper, pour order 8): 5240,-580 5240,2710 -3160,2710 -3160,-590

## Other copper
Top Layer:
  text "RLF_DCLT_30.1.0" at 3380,2570 h40
Bottom Layer:
  text "RLF_DCLT_30.1.0" at 3270,2580 h40

## Silkscreen, mask and mechanical layers (free items; w line width, h text height)
Top Overlay:
  lines w10: 3580,-410 3600,-430
  text "WWW.RELIEF SYSTEMS.COM" at 1990,2580 h60
  text "G" at 4520,1680 h40
  text "TX" at 4800,1680 h40
  text "RX" at 4410,1500 h40
  text "3V" at 4890,1500 h40
  text "TX" at 4390,1250 h40
  text "RX" at 4490,1250 h40
  text "G" at 4610,1250 h40
  text "5V" at 4720,1250 h40
  text "RB6" at -2970,700 h40
  text "RB7" at -2970,590 h40
  text "GND" at -2970,500 h40
  text "+5V" at -2970,390 h40
  text "RES" at -2970,280 h40
  text "FASR" at -2660,-410 h60
  text "SLOW" at -1820,-410 h60
  text "HOLD TIME" at -230,-410 h60
  text "REST TIME" at 1290,-410 h60
  text "MODE" at 2870,-410 h60
Mechanical 15:
  lines w10: -3070,-460 -3030,-420 ; -3070,2570 -3030,2530 ; 5100,-460 5110,-450 ; -3190,-620 -3190,2730 -2890,2730 5250,2730 5260,2720 5260,-620 -3190,-620

## Text inside footprints (layer, text, board x,y; h text height)
P1: Top Overlay "16" at 4690,890 h50 r90; Top Overlay "8" at 4790,890 h50 r90; Top Overlay "1" at 4790,10 h50 r90; Top Overlay "9" at 4690,10 h50 r90